# Altium PCB 除臭.PcbDoc
Units mm, origin at the board's own origin, x right, y up, seen from the top; angles counter-clockwise.
Board outline 21.83 x 37.08 mm, 2 copper layers (Top Layer, Bottom Layer); 39 components, 22 nets, 117 pads, 38 vias.
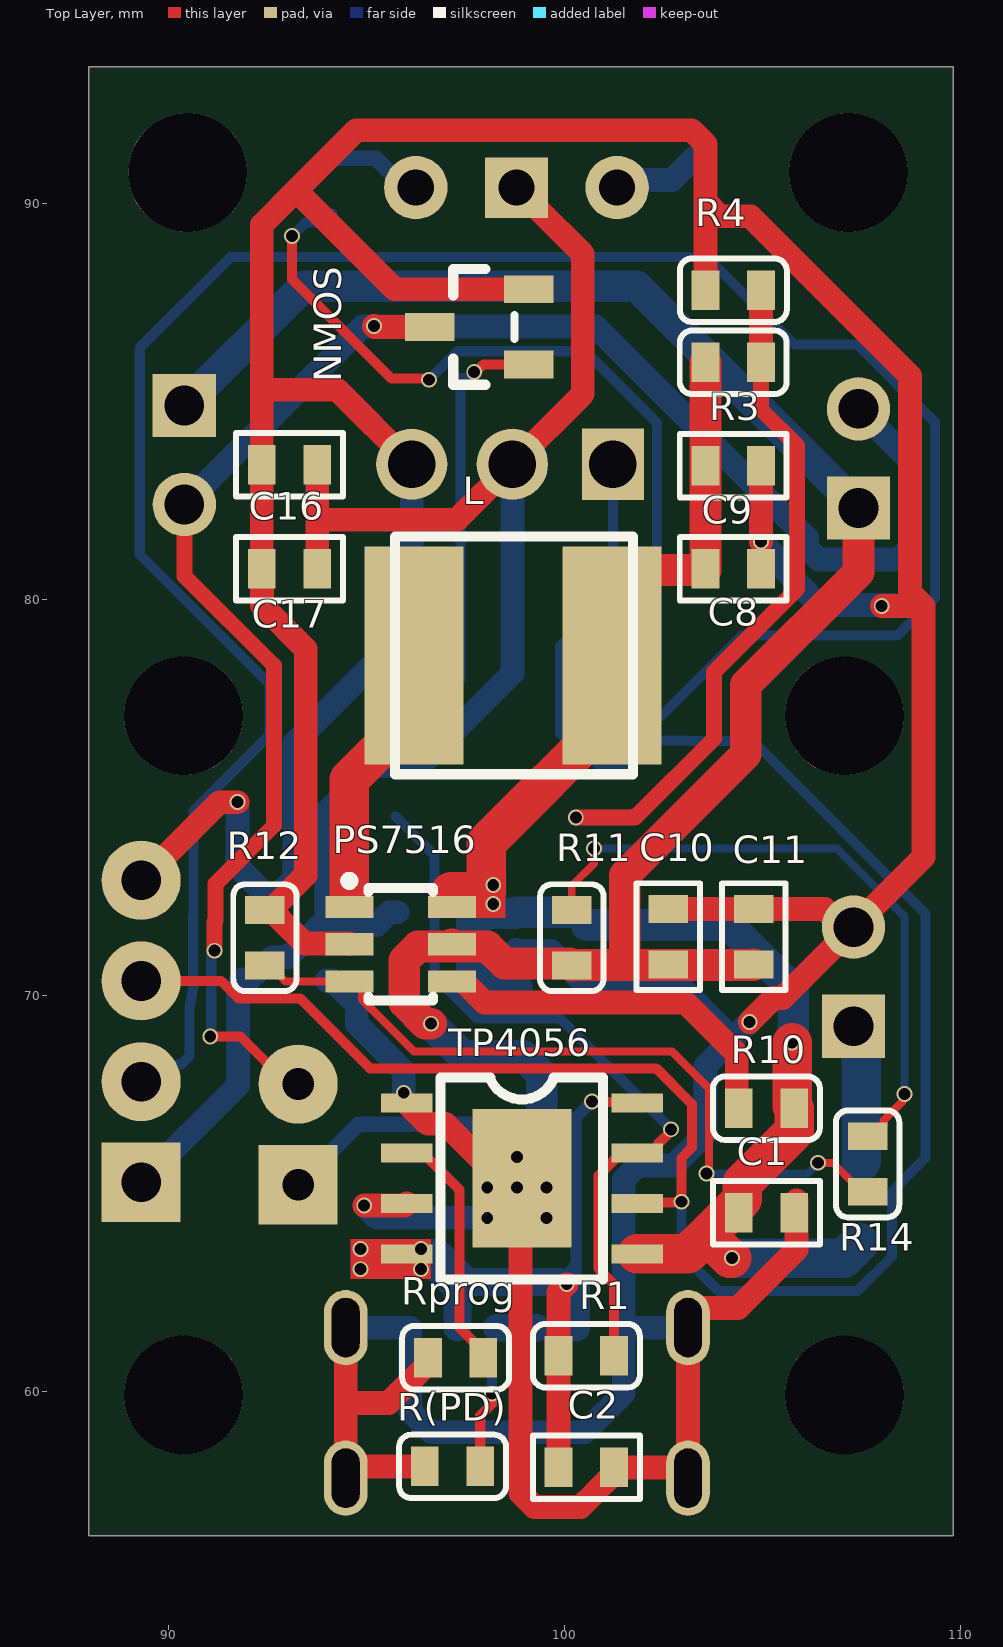
[diagram p0: Top Layer view]
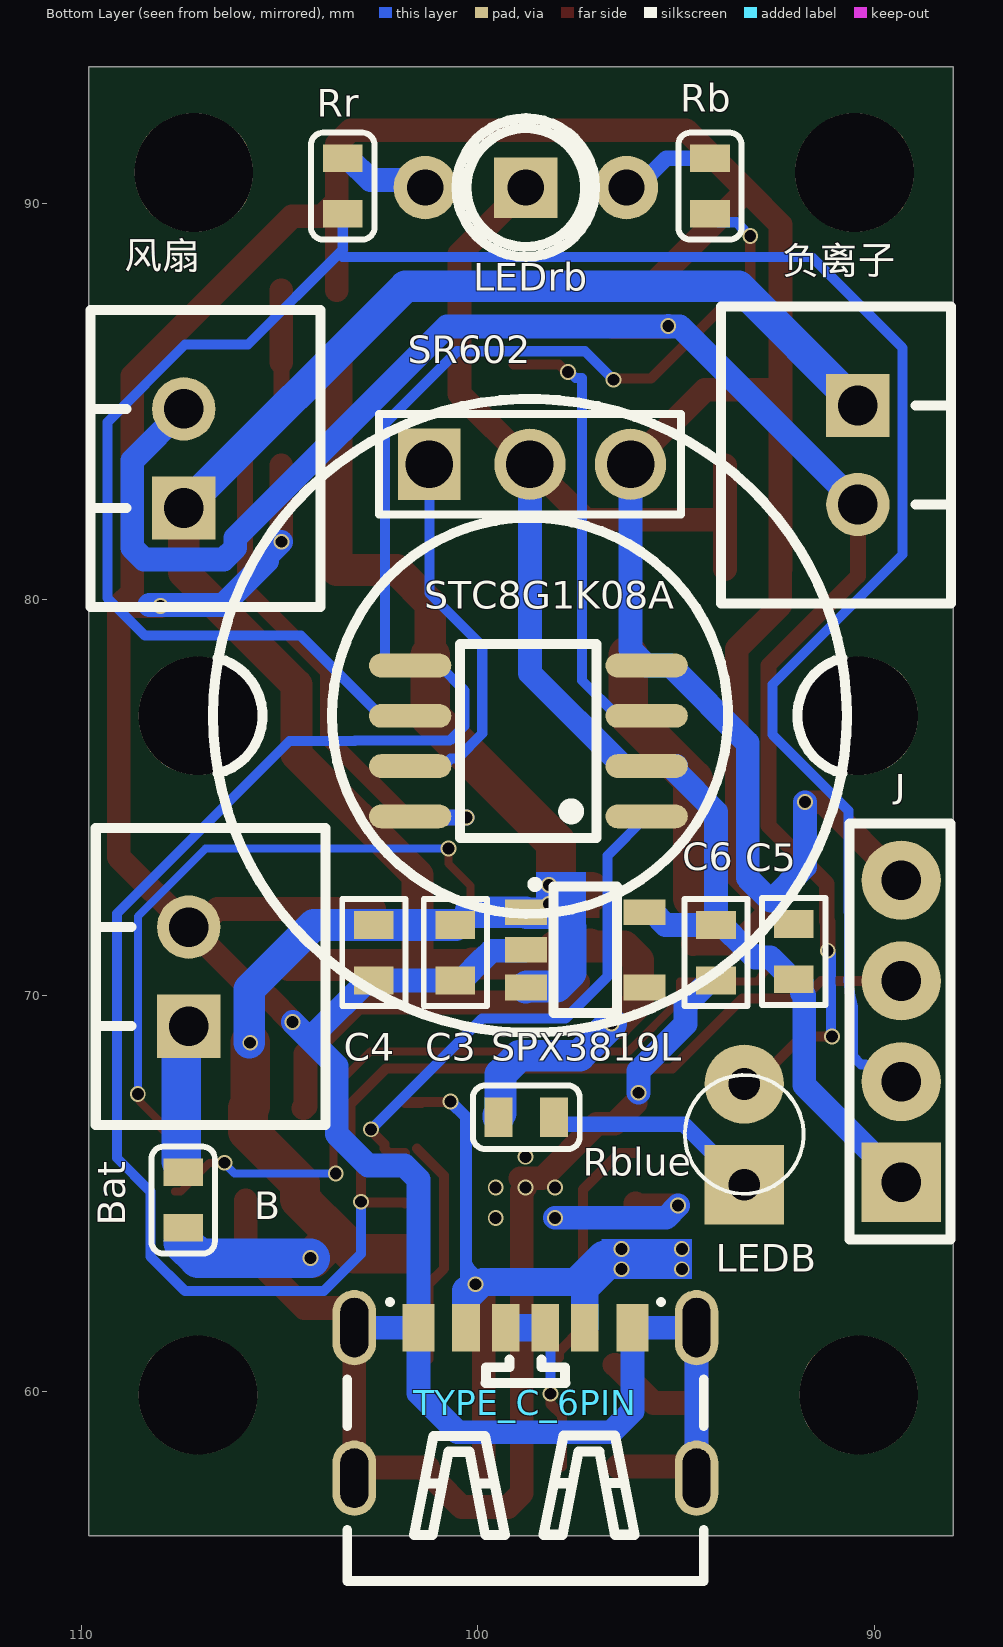
[diagram p1: Bottom Layer view, seen from below]
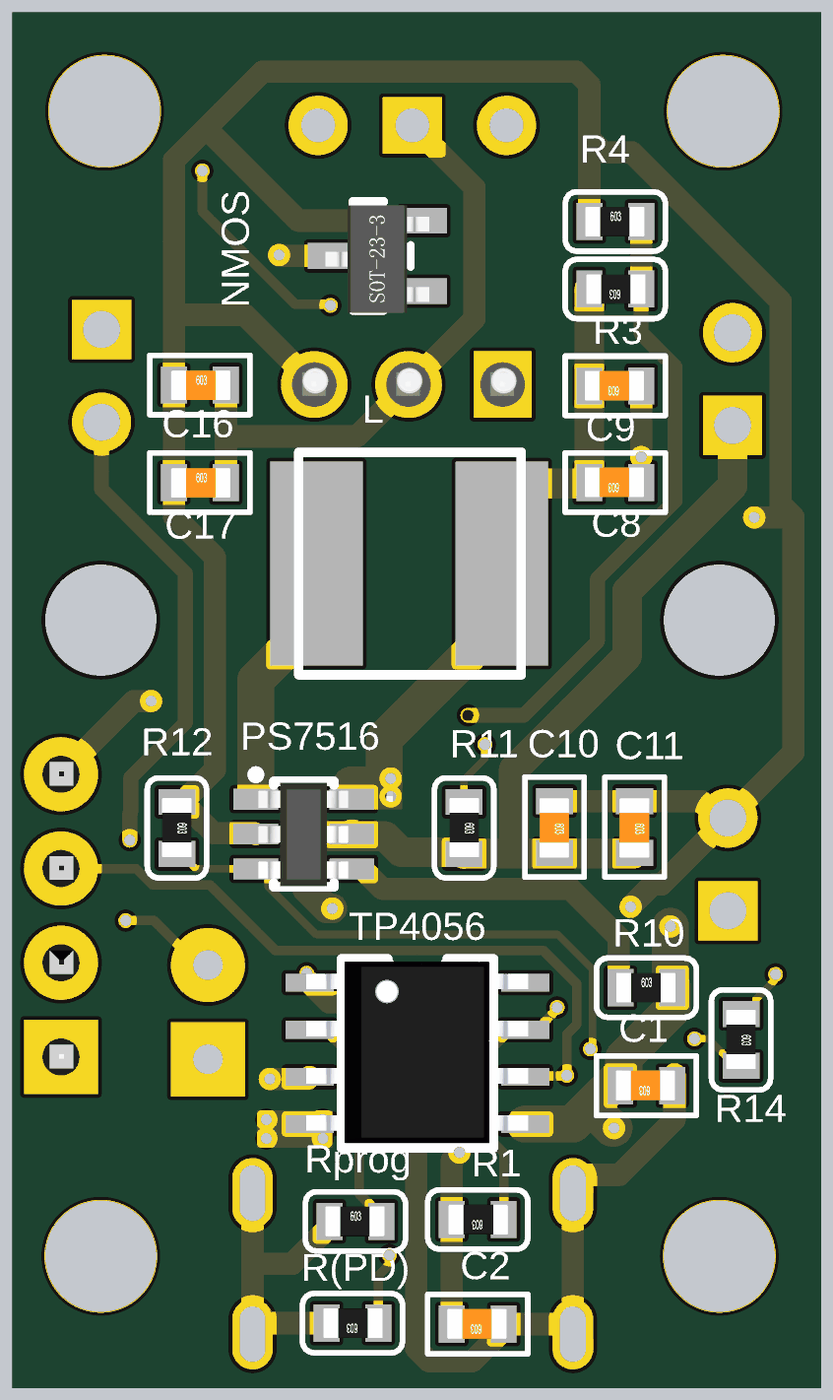
[diagram p2: 3D render of the assembled board from above, using the file's embedded part models]
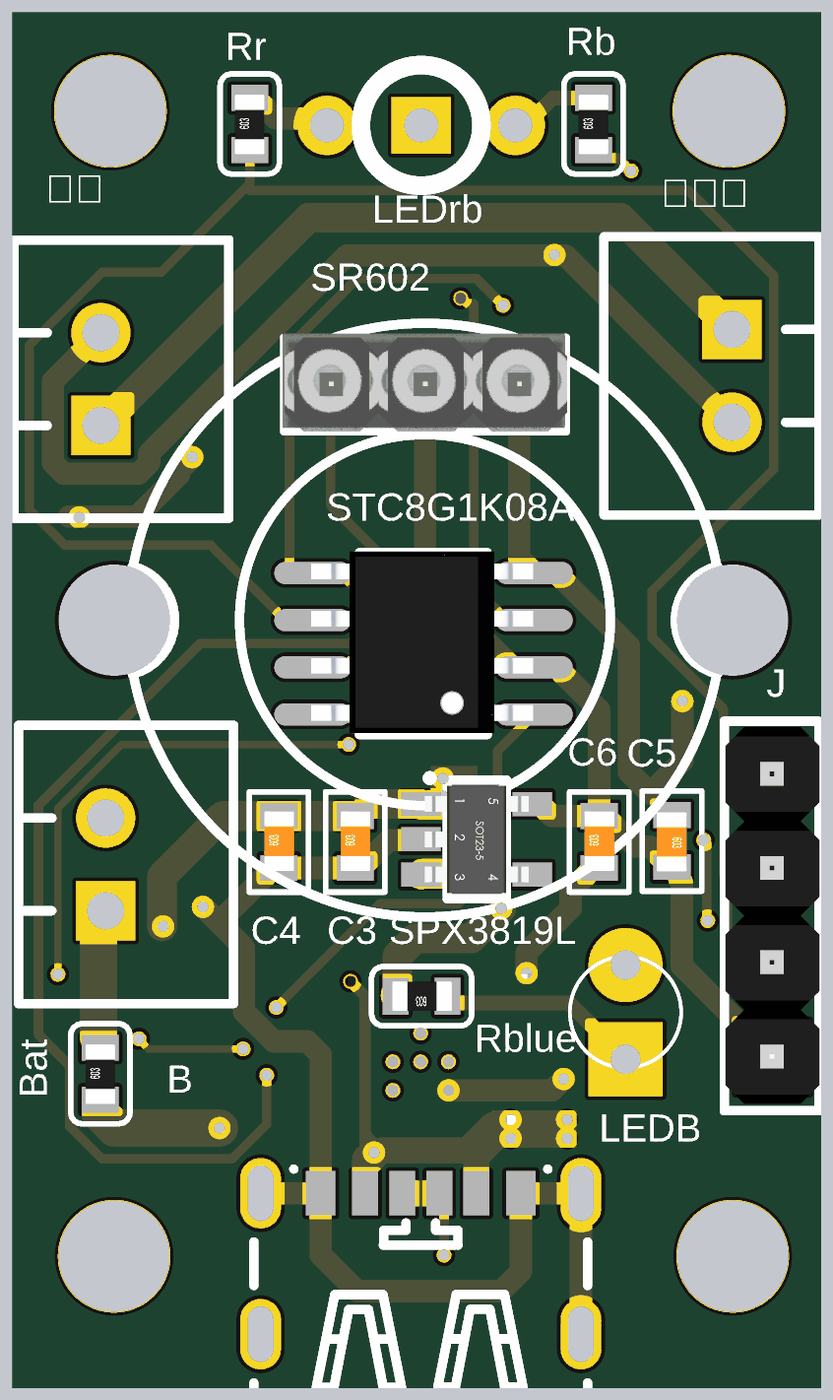
[diagram p3: 3D render of the assembled board from below, using the file's embedded part models]

## Layer stack, top to bottom
Top Solder: solder mask 0.0102, Solder Resist, Dk 3.5
Top Layer: signal copper 0.0356
Dielectric 1: dielectric 0.32, FR-4, Dk 4.8
Bottom Layer: signal copper 0.0356
Bottom Solder: solder mask 0.0102, Solder Resist, Dk 3.5

## Board outline
87.994,56.359 109.822,56.359 109.822,93.443 87.994,93.443

## Design rules (kind name [scope] priority, off if disabled: settings)
Clearance PUT [InPolygon] p1: gap=0.2 ignorepadtopadclearanceinfootprint=TRUE except(0: Arc-Hole Track-Hole SMDPad-Hole THPad-Hole Via-Hole Fill-Hole Poly-Hole Region-Hole Text-Hole)
Clearance [All] p2: gap=0.2 ignorepadtopadclearanceinfootprint=TRUE except(0: Arc-Hole Track-Hole SMDPad-Hole THPad-Hole Via-Hole Fill-Hole Poly-Hole Region-Hole Text-Hole)
ComponentClearance [All] p1 off: gap=0.254 collisioncheckmode=3 verticalgap=2540 showdistances=FALSE
PolygonConnect [All] p1: connectstyle=Direct reliefconductorwidth=0.254 reliefentries=4 polygonreliefangle="90 Angle" airgapwidth=0.254
RoutingVias [All] p1: holewidth=0.711 width=1.27 viastyle="Through Hole" minholewidth=0.711 minwidth=1.27 maxholewidth=0.711 maxwidth=1.27
SolderMaskExpansion [All] p1: expansion=0.102 istentingtop=FALSE
Width BAT [InNet('Bat')] p1: maxlimit=2 minlimit=0.6 preferedwidth=1
Width 5V [InNet('5V')] p2: maxlimit=3 minlimit=0.254 preferedwidth=0.6
Width VUSB [InNet('+VUSB')] p3: maxlimit=5 minlimit=0.254 preferedwidth=2
Width First_rules [All] p4: maxlimit=1 minlimit=0.2 preferedwidth=0.254
29 further rules are at their usual default settings.

## Components (designator, comment, footprint, x,y, rotation, side; value= is the part's Value field where it differs from the comment)
B "保险丝" "0603 电阻" 107.441,64.821 r90 bottom
Bat "Li-lon" XH-2.54-2P 107.302,70.688 r90 bottom locked
C1 "10uF" "0603 电容" 105.088,64.537 r180 top
C2 "10uF" "0603 电容" 100.542,58.111 r180 top
C3 "10uF" "0603 电容" 100.542,71.091 r90 bottom
C4 "100nF" "0603 电容" 102.599,71.091 r90 bottom
C5 "100nF" "0603 电容" 92.05,71.095 r270 bottom
C6 "10uF" "0603 电容" 93.963,71.091 r90 bottom
C8 "10uF" "0603 电容" 104.25,80.793 r180 top
C9 "100nF" "0603 电容" 104.25,83.401 r180 top
C10 "100nF" "0603 电容" 102.599,71.472 r270 top
C11 "22uF" "0603 电容" 104.758,71.472 r270 top
C16 "10uF" "0603 电容" 93.071,83.371 r0 top
C17 "100nF" "0603 电容" 93.071,80.743 r0 top
J "插针 1*4 排座" 插针1*4 89.264,69.186 r0 bottom locked
L "10uH" "电感 贴片 6*6" 101.727,81.584 r180 top
LEDB "LED3MM" LED3MM 93.226,66.52 r90 bottom locked
LEDrb "双色灯" 双色LED_F3 98.559,90.683 r180 bottom locked
NMOS "SSM35324R" NOMOS 97.748,86.788 r0 top
PS7516 "PS7516" PS7516 96.122,71.091 r270 top locked
R1 "1.2k" "0603 电阻" 100.567,60.905 r180 top
R3 "10k" "0603 电阻" 104.276,85.984 r180 top
R4 "10k" "0603 电阻" 104.25,87.804 r0 top
R10 "10K" "0603 电阻" 105.088,67.154 r0 top
R11 "510k" "0603 电阻" 100.186,71.472 r270 top
R12 "100k" "0603 电阻" 92.439,71.472 r270 top
R14 "15k" "0603 电阻" 107.654,65.76 r270 top
R(PD) "5.1k" "0603 电阻" 97.189,58.111 r180 top
Rb "1K" "0603 电阻" 94.141,90.42 r90 bottom
Rblue "1K" "0603 电阻" 98.764,66.925 r0 bottom
Rprog "1.2k" "0603 电阻" 97.24,60.854 r0 top
Rr "1K" "0603 电阻" 103.412,90.42 r90 bottom
SPX3819L "SPX3819L" SPX3819 97.288,71.33 r180 bottom locked
SR602 "SR602" SR602 98.789,77.06 r270 bottom locked
STC8G1K08A "STC8G1K08A" STC8G1K08A 98.766,76.21 r0 bottom locked
TP4056 "TP4056" TP4056 98.789,65.122 r270 top locked
TYPE_C_6PIN "TYPE_C_6PIN" TYPE_C_PIN 98.281,59.534 r180 bottom locked
负离子 "XH2.54-2p" XH-2.54-2P 90.403,83.431 r270 bottom locked
风扇 "XH2.54-2p" XH-2.54-2P 107.429,83.769 r90 bottom locked

## Footprints (in the part's own frame and the unit in brackets; to place one, negate y for a bottom-side part, rotate by r counter-clockwise, add the part's x,y. Pads: shape width x height; smd on the part's side, far side on the other; paste and mask are expansions set on the pad)
"0603 电容" [mm]
  rect 0.7x1 smd: 1(-0.711,0.025) 2(0.689,0.025)
  silkscreen extent -1.36,-0.77 1.34,0.83, body extent -0.79,-0.38 0.81,0.42, height 0.3
"0603 电阻" [mm]
  rect 0.7x1 smd: 1(-0.686,0) 2(0.714,0)
  silkscreen extent -1.34,-0.8 1.36,0.8, body extent -0.8,-0.4 0.8,0.4, height 0.3
LED3MM [mm]
  rect 2x2 hole 0.8: 1(-1.297,0.052)
  round 2 hole 0.8: 2(1.243,0.052)
  silkscreen extent -1.53,-1.44 1.47,1.55, body extent -1.59,-1.63 1.4,1.37, height 12.5
NOMOS [mm]
  rect 1.25x0.7 smd: 1(1.346,-0.862) 2(1.346,1.038) 3(-1.153,0.088)
  silkscreen extent -0.55,-1.37 1,1.55, body extent -1.3,-1.45 1.5,1.45, height 1.2
PS7516 [mil]
  rect 22.2x47.7 smd: 1(-45,-61.15) 2(-8,-61.15) 3(29,-61.15) 4(29,40.85) 5(-8,40.85) 6(-45,40.85)
  silkscreen extent -75,-65 48,22, body extent -62,-58 48,37, height 43
SPX3819 [mil]
  rect 41.8x25.6 smd: 1(-59.1,30.39) 2(-59.1,-7.01) 3(-59.1,-44.41) 4(59,-44.41) 5(59,30.39)
  silkscreen extent -53,-70 31,60, body extent -55,-64 55,50, height 43
SR602 [mm]
  rect 1.8x1.575 hole 1.2: 1(-6.35,-2.437)
  round 1.8 hole 1.2: 2(-6.35,0.103) 3(-6.35,2.643)
  round 3 hole 3 unplated: ""(0,-8.279) ""(0,8.402)
  silkscreen extent -8,-7.9 8,8.1, body extent -8.03,-10.94 7.97,10.94, height 18.5
STC8G1K08A [mm]
  oval 2.078x0.6 smd: 1(-3.025,1.69) 2(-3.025,0.42) 3(-3.025,-0.85) 4(-3.025,-2.12) 5(2.944,-2.12) 6(2.944,-0.85) 7(2.944,0.42) 8(2.944,1.69)
  silkscreen extent -1.76,-2.67 1.69,2.23, body extent -2.99,-2.7 3,2.2, height 1.55
TP4056 [mm]
  rect 0.48x1.3 smd: 1(-2.167,-2.77) 2(-0.897,-2.77) 3(0.373,-2.77) 4(1.643,-2.77) 5(1.643,3.046) 6(0.373,3.046) 7(-0.897,3.046) 8(-2.167,3.046)
  rect 3.5x2.5 smd: 9(-0.262,0.138)
  silkscreen extent -2.81,-1.91 2.29,2.19, body extent -2.74,-2.87 2.16,3.12, height 1.55
TYPE_C_PIN [mm]
  oval 1.1x1.899 hole 0.7 slot 1.5 at 90 deg: 7(-4.838,-1.72) 7(-4.838,2.08) 7(3.802,-1.72) 7(3.802,2.08)
  rect 0.7x1.2 smd: A5(-1.018,2.08) A9(0.982,2.08) B5(-0.018,2.08) B9(-2.018,2.08)
  rect 0.8x1.2 smd: A12(2.182,2.08) B12(-3.218,2.08)
  silkscreen extent -5.02,-4.32 3.98,2.73, body extent -5.21,-4.45 4.45,3.05, height 3
XH-2.54-2P [mm]
  rect 1.6x1.6 hole 1: 1(-1.463,-0.004)
  round 1.6 hole 1: 2(1.037,-0.004)
  silkscreen extent -3.96,-3.45 3.54,2.35, body extent -4.06,-3.56 3.71,2.46, height 7.2
双色LED_F3 [mm]
  round 1.6 hole 0.914: 1(-2.77,-0.289) 2(2.31,-0.289)
  rect 1.6x1.524 hole 0.914: 3(-0.23,-0.289)
  silkscreen extent -1.98,-2.04 1.52,1.46, body extent -1.74,-1.8 1.24,1.19, height 12.5
插针1*4 [mm]
  rect 2x2 hole 1: 1(0.05,3.9)
  round 2 hole 1: 2(0.05,1.36) 3(0.05,-1.18) 4(0.05,-3.72)
  silkscreen extent -1.2,-5.15 1.35,5.35, body extent -1.22,-4.99 1.32,5.17, height 8.38
"电感 贴片 6*6" [mm]
  rect 2.5x5.5 smd: 1(0.525,3.001) 2(5.525,3.001)
  silkscreen extent 0,0 6,6, body extent 0.12,0.4 5.83,5.6, height 4.5

## Part data
B R1 R3 R4 R10 R11 R12 R14 R(PD) Rb Rblue Rprog Rr: library part 电阻
Bat: library part XH2.54-2p
C1 C2 C3 C4 C5 C6 C8 C9 C10 C11 C16 C17: library part "电容 无极"
L: library part 电感
NMOS: library part NMOS
SPX3819L: library part SPX3819LM

## Free pads (board coordinates)
  round 3 hole 3: 104(90.387,59.915) 104(90.49,90.776) 104(107.068,59.915) 104(107.171,90.776)

## Via types
v1: diameter 0.4, hole 0.3, Top Layer to Bottom Layer, 38 vias

## Nets (pads, with @x,y where several pads share a name; then routed paths per layer and width w, separated by ;. In a path a pad name is that pad's centre, name@x,y a point inside that pad or via, vN(x,y) a via of type N, cw(c..) or ccw(c..) an arc to the next point about the centre after c; other vN are vias at no path point)
3V3: C5.2 C6.2 C16.2 C17.2 J.1 LEDrb.3 SPX3819L.5 SR602.2 STC8G1K08A.2 | length 41.5
  Top Layer w0.6: C17.2@93.763,80.768 93.763,82.01 ; C16.2@93.763,83.384 93.763,82.01 ; LEDrb.3 98.827,90.395 99.289,89.933 99.289,89.895 100.466,88.718 100.466,85.189 SR602.2 97.286,82.01 93.763,82.01
  Bottom Layer w0.6: J.1 91.759,67.73 91.759,70.004 91.824,70.07 91.824,70.356 91.87,70.402 C5.2@92.056,70.402 ; C5.2@92.224,70.563 92.617,70.956 93.008,70.956 93.281,71.229 93.289,71.229 93.789,71.729 93.939,71.729 C6.2 ; SPX3819L.5 95.584,72.102 95.262,71.779 C6.2 ; SR602.2 98.686,78.134 96.342,75.79 STC8G1K08A.2 95.002,75.79 95.002,75.651 93.989,74.637 C6.2
5V: C10.2 C11.2 PS7516.5 R11.2 Rblue.2 负离子.1 风扇.1 | length 50.2
  Top Layer w0.8: v1(96.63,69.287) 96.49,69.287 95.954,69.824 95.954,70.884 96.305,71.236 97.102,71.236 PS7516.5 ; PS7516.5@97.16,71.236 98.058,71.236 98.486,70.807 100.136,70.807 R11.2 100.199,70.77 101.558,70.77 ; C11.2 104.771,70.77 102.625,70.77 101.558,70.77 ; 风扇.1 107.425,80.685 104.58,77.84 104.58,76.091 101.525,73.035 101.525,70.803 101.558,70.77
  Bottom Layer w0.8: 负离子.1 93.419,87.905 101.826,87.905 风扇.1 ; v1(96.63,69.287) 97.437,68.48 98.959,68.48 99.428,68.012 99.428,67.025 99.478,66.975 Rblue.2
+VUSB: C2.2 R1.2 TP4056.4 TP4056.8 TYPE_C_6PIN.A9 TYPE_C_6PIN.B9 | length 18
  Top Layer w0.254: v1(100.694,67.323) 100.712,67.305 101.818,67.305 TP4056.8 TP4056.8@101.426,67.288
  Top Layer w0.6: C2.2 R1.2 99.853,62.502 v1(100.059,62.709)
  Top Layer w1: 95.098,63.352 95.106,63.344
  Bottom Layer w0.254: 99.297,62.836 ccw(c99.551,63.598) 100.299,63.305 ccw(c99.551,63.598) 100.313,63.344
  Bottom Layer w0.3: 100.27,62.582 100.299,62.582 100.299,63.305 100.299,63.344 100.299,66.928 v1(100.694,67.323)
  Bottom Layer w0.7: TYPE_C_6PIN.A9 97.299,62.802 ; 97.721,62.764 99.297,62.764 99.877,62.764 100.179,62.462 ; 100.27,62.582 100.299,62.552 TYPE_C_6PIN.B9
  Bottom Layer w1: 96.789,63.312 97.299,62.802
  other v1: 94.852,63.09 96.376,63.09 94.852,63.598 96.376,63.598
ADC: R3.1 R4.2 STC8G1K08A.8 | length 18.3
  Top Layer w0.4: v1(100.288,74.494) 101.786,74.494 103.78,76.488 103.78,78.171 105.876,80.267 105.876,83.877 104.961,84.791 R3.1
  Top Layer w0.6: R3.1 104.963,85.985 104.963,87.802 R4.2
  Bottom Layer w0.4: v1(100.288,74.494) 101.685,74.494 STC8G1K08A.8
Bat: B.1 C1.2 C3.2 C4.2 C8.2 C9.2 L.1 PS7516.6 R3.2 R10.2 SPX3819L.1 SPX3819L.3 TP4056.5 | length 41.8
  Top Layer w0.8: L.1 101.202,79.893 102.052,80.743 103.561,80.743 C8.2 C9.2 R3.2
  Top Layer w1: 97.138,72.615 98.027,72.615 98.027,73.853 101.202,77.028 L.1 ; TP4056.5 103.115,63.478 103.589,63.953 ; v1(104.228,63.369) 104.173,63.369 103.589,63.953 ; v1(105.749,68.805) 105.749,67.207 R10.2 105.803,66.572 104.49,65.26 104.49,64.853 104.349,64.713 103.589,63.953
  Bottom Layer w0.8: SPX3819L.3 98.764,70.226 98.01,70.226 97.658,70.578 97.658,71.725 98.01,72.077 98.764,72.077 SPX3819L.1 C3.2@100.195,72.102 ; C3.2 C4.2 104.146,71.779 105.774,70.151 v1@105.774,68.805
  Bottom Layer w1: v1(104.228,63.369) 107.056,63.369 107.441,63.754
  other v1: 104.228,63.369 98.205,72.31 98.205,72.792
CHRG: R1.1 STC8G1K08A.1 TP4056.7 | length 19
  Top Layer w0.254: R1.1@101.253,60.827 101.253,62.708 100.859,63.103 100.859,65.451 TP4056.7@101.539,66.131 ; TP4056.7 102.246,66.018 102.359,66.131 102.359,66.244 102.695,66.581 v1(102.695,66.62)
  Bottom Layer w0.254: STC8G1K08A.1 96.725,73.536 96.725,70.483 97.794,69.414 99.901,69.414 v1(102.695,66.62)
GND: Bat.2 C1.1 C2.1 C3.1 C4.1 C5.1 C6.1 C8.1 C9.1 C10.1 C11.1 C16.1 C17.1 J.4 NMOS.2 PS7516.2 R4.1 R12.1 R(PD).2 Rprog.1 SPX3819L.2 SR602.3 STC8G1K08A.4 TP4056.1 TP4056.3 TP4056.9 TYPE_C_6PIN.7 TYPE_C_6PIN.A12 TYPE_C_6PIN.B12 | length 178.6
  Top Layer w0.6: J.4@89.693,72.906 J.4 91.288,74.879 v1(91.745,74.879) ; TYPE_C_6PIN.7@94.289,61.804 94.479,61.614 94.479,59.714 ; PS7516.2 94.551,71.312 93.442,71.312 93.146,71.607 93.139,71.607 92.589,72.157 93.468,73.036 93.468,78.749 92.366,79.851 92.366,80.762 C17.1 C16.1 92.36,85.289 ; v1(94.945,64.694) 95.965,64.694 TP4056.3 ; TP4056.1 96.549,66.758 97.001,66.758 98.376,65.383 TP4056.9 ; SR602.3 94.267,85.289 92.36,85.289 ; 96.475,58.111 94.71,58.111 94.479,57.88 94.479,57.814 94.479,59.714 ; Rprog.1@96.554,60.677 96.552,60.675 96.525,60.675 95.563,59.714 94.479,59.714 ; v1(98.802,65.155) 98.891,65.067 98.891,57.437 99.242,57.086 100.41,57.086 100.779,57.454 100.779,57.462 101.253,57.936 C2.1 102.888,58.086 103.119,57.855 TYPE_C_6PIN.7@103.119,57.814 ; NMOS.2 95.719,87.826 93.224,90.32 ; C10.1 C11.1 106.57,72.183 107.028,71.726 Bat.2 ; TYPE_C_6PIN.7@103.119,58.309 103.119,61.614 103.119,61.878 103.35,62.109 104.382,62.109 105.859,63.585 C1.1@105.859,64.822 ; R4.1 103.561,87.807 103.561,90.041 ; v1(104.676,69.332) 105.277,69.933 105.505,69.933 Bat.2 ; v1(104.961,81.454) C9.1 ; v1(108.009,79.828) 109.068,79.828 ; 92.36,85.289 92.36,89.456 93.224,90.32 ; 93.224,90.32 94.746,91.842 103.21,91.842 103.561,91.491 103.561,90.041 ; 103.561,90.041 103.933,89.67 104.696,89.67 108.725,85.64 108.725,80.171 109.068,79.828 ; Bat.2 109.068,73.496 109.068,79.828
  Bottom Layer w0.6: v1(91.745,74.879) 91.745,73.25 92.606,72.388 93.189,72.97 93.189,76.377 95.141,78.33 STC8G1K08A.4 96.146,78.735 SR602.3 ; C6.1 94.139,70.379 94.759,69.759 94.759,69.279 95.944,68.093 v1(95.944,67.543) ; TYPE_C_6PIN.7@94.479,57.814 94.479,61.614 TYPE_C_6PIN.A12 96.099,59.506 96.63,58.975 100.516,58.975 101.499,59.958 TYPE_C_6PIN.B12 ; v1(94.945,64.694) 95.254,64.385 v1(98.053,64.385) ; SPX3819L.2 98.814,71.126 99.663,71.126 99.86,70.929 99.867,70.929 100.417,70.379 C3.1 C4.1 102.775,70.379 104.095,69.059 ; TYPE_C_6PIN.7@103.119,61.614 TYPE_C_6PIN.B12 ; v1(104.676,69.332) 104.249,68.905 103.564,68.22 103.564,66.5 102.771,65.706 101.851,65.706 101.499,65.354 TYPE_C_6PIN.B12 ; v1(104.961,81.454) 105.325,81.09 105.325,80.968 106.44,79.854 108.289,79.854
  other v1: 99.551,64.385 98.053,65.155 99.551,65.155 98.802,65.926
NetB_2: B.2 Bat.1 | length 3.5
  Bottom Layer w1: Bat.1 107.493,69.031 B.2@107.493,65.811
NetL_2: L.2 PS7516.1 | length 6.8
  Top Layer w1: PS7516.1@94.569,72.452 94.569,75.45 96.202,77.084 L.2
NetLEDB_1: LEDB.1 Rblue.1 | length 5.5
  Bottom Layer w0.4: LEDB.1 94.801,66.747 97.928,66.747 98.078,66.897 Rblue.1
NetLEDB_2: LEDB.2 NMOS.3 负离子.2 风扇.2 | length 46.1
  Top Layer w0.254: v1(91.059,68.961) 91.821,68.961 93.019,67.763 LEDB.2
  Top Layer w0.4: 负离子.2 90.407,80.59 92.668,78.33 92.668,74.291 91.195,72.818 91.195,71.878 91.168,71.852 v1(91.168,71.13)
  Top Layer w0.6: v1(95.194,86.901) 95.219,86.876 NMOS.3
  Bottom Layer w0.254: v1(91.059,68.961) 91.084,68.986 91.084,70.17 ccw(c89.314,70.366) 91.084,70.561 91.084,71.046 v1(91.168,71.13)
  Bottom Layer w0.6: 负离子.2 94.903,86.889 v1@95.182,86.889 ; v1(95.194,86.901) v1@95.182,86.889 ; 风扇.2 108.725,83.507 108.725,81.299 108.432,81.007 106.418,81.007 106.125,81.299 106.125,81.547 100.783,86.889 v1@95.182,86.889
NetLEDrb_1: LEDrb.1 Rr.2 | length 2.5
  Bottom Layer w0.6: LEDrb.1 101.52,90.586 102.714,90.586 103.262,91.134 Rr.2 Rr.2@103.362,91.084
NetLEDrb_2: LEDrb.2 Rb.2 | length 2.5
  Bottom Layer w0.4: Rb.2 95.241,91.134 95.981,90.395 LEDrb.2 LEDrb.2@96.2,90.345
NetNMOS_1: NMOS.1 STC8G1K08A.3 | length 11.5
  Top Layer w0.254: v1(97.722,85.735) 97.762,85.735 97.953,85.926 NMOS.1
  Bottom Layer w0.254: STC8G1K08A.3 96.48,77.06 97.373,77.953 97.373,85.587 97.534,85.587 97.683,85.735 v1(97.722,85.735)
NetPS7516_3: PS7516.3 R12.2 R14.2 | length 19.5
  Top Layer w0.2: R12.2 92.589,70.757 92.839,70.507 92.839,70.471 92.956,70.354 94.893,70.354 94.893,69.895 96.2,68.587 102.715,68.587 103.649,67.653 103.649,65.562 v1(103.59,65.503) ; v1(106.398,65.777) 106.417,65.777 106.42,65.773 106.776,65.773 107.504,65.045 R14.2
  Bottom Layer w0.2: v1(103.59,65.503) 106.143,65.503 106.398,65.758 v1(106.398,65.777)
NetPS7516_4: PS7516.4 R10.1 | length 9
  Top Layer w0.6: PS7516.4@97.466,70.336 97.981,69.821 103.056,69.821 104.353,68.524 104.353,67.204 R10.1
NetR11_1: R11.1 R14.1 | length 16.4
  Top Layer w0.2: R11.1 100.186,72.767 100.745,73.326 v1(100.745,73.707) ; R14.1 107.804,66.445 108.054,66.695 108.054,66.845 108.547,67.338 108.547,67.475 v1(108.585,67.513)
  Bottom Layer w0.2: v1(100.745,73.707) 106.873,73.707 108.585,71.994 v1(108.585,67.513)
NetR(PD)_1: R(PD).1 TYPE_C_6PIN.A5 TYPE_C_6PIN.B5 | length 4.7
  Top Layer w0.254: 97.875,58.111 97.875,59.394 98.171,59.69 v1(98.171,59.944)
  Bottom Layer w0.254: v1(98.171,59.944) 98.171,61.452 98.154,61.469 TYPE_C_6PIN.B5
  Bottom Layer w0.7: TYPE_C_6PIN.B5 TYPE_C_6PIN.A5
NetRprog_2: Rprog.2 TP4056.2 | length 6.2
  Top Layer w0.254: TP4056.2 96.429,66.018 97.35,65.097 97.35,61.608 97.954,61.004 Rprog.2
P32: SR602.1 STC8G1K08A.7 | length 9.5
  Bottom Layer w0.254: SR602.1 101.226,80.159 99.89,78.823 99.89,76.612 100.523,75.979 100.689,75.979 100.877,75.79 STC8G1K08A.7
RXD: J.3 Rb.1 STC8G1K08A.5 TP4056.6 | length 69.1
  Top Layer w0.254: J.3 91.336,70.366 91.774,69.927 93.323,69.927 95.09,68.16 102.316,68.16 103.222,67.254 103.222,66.166 102.955,65.899 v1(102.955,64.791) 102.933,64.77 101.857,64.77 TP4056.6 ; v1(93.125,89.169) 93.125,88.083 95.637,85.571 96.551,85.571 v1(96.579,85.543)
  Bottom Layer w0.254: 93.3,89.344 93.467,89.511 ; Rb.1 Rb.1@93.926,89.519 ; v1(96.579,85.543) 97.299,86.262 100.523,86.262 102.341,84.445 102.341,78.489 102.181,78.33 STC8G1K08A.5 100.971,78.33 100.344,77.703 100.344,76.8 100.711,76.433 103.099,76.433 103.107,76.425 104.759,76.425 109.112,72.071 109.112,65.893 108.268,65.05 108.268,63.411 107.399,62.542 103.886,62.542 102.955,63.473 v1(102.955,64.791) ; 93.467,89.511 93.918,89.511 Rb.1@93.926,89.519 ; 93.467,89.511 93.475,89.519 Rb.1@93.926,89.519
TXD: J.2 Rr.1 STC8G1K08A.6 | length 58.6
  Bottom Layer w0.254: J.2 89.787,67.826 90.219,68.258 90.327,68.258 90.532,68.463 90.532,69.602 90.532,69.707 90.613,70.092 ccw(c89.314,70.366) 90.63,70.534 90.63,71.234 90.641,72.896 ccw(c89.314,72.906) 90.641,72.906 90.641,73.153 90.641,74.662 92.562,76.583 92.562,77.852 89.28,81.133 89.28,86.349 91.574,88.642 103.412,88.642 ; STC8G1K08A.6 102.449,77.06 104.472,79.083 108.405,79.083 109.352,80.03 109.352,84.473 107.392,86.434 105.804,86.434 103.412,88.825 Rr.1
pads on no net: SPX3819L.4 SR602.

## Polygon pours and split planes (outlines as drawn)
no net on Bottom Layer "NONET_L02_P000" (solid, pour order 0): 99.678,63.09

## Other copper
Top Layer:
  rectangle net +VUSB: 94.598,62.836 96.63,63.852
  rectangle net Bat: 96.935,71.954 98.51,73.021
  pour cut-out: 106.79,83.307 106.813,80.938 106.401,80.526 106.332,80.526 106.257,80.601 106.257,83.307
Bottom Layer:
  rectangle net +VUSB: 94.598,62.836 96.884,63.852
  rectangle net Bat: 97.265,71.725 98.535,73.123
  pour cut-out: 101.56,82.31 102.007,82.31 102.007,78.839 100.815,78.839 100.5,78.525 100.5,78.33 100.389,78.219 100.224,78.219 100.224,78.685 101.462,79.923 101.462,79.959 101.534,80.032 101.534,80.134 101.56,80.159
  pour cut-out: 94.498,74.145 94.498,72.329 94.539,72.289 95.05,72.289 95.059,72.297 95.059,72.627 96.391,72.627 96.391,73.398 95.741,74.049 94.76,74.049 94.625,74.183
  pour cut-out: 97.707,82.671 97.707,78.055 97.781,78.055 97.834,78.003 98.176,78.345 98.176,82.43 97.893,82.714 97.75,82.714
  pour cut-out: 101.227,87.167 106.308,82.085 106.377,82.085 106.425,82.134 106.425,82.441 101.573,87.294 101.279,87.294
  pour cut-out: 94.407,87.294 93.672,87.294 91.407,85.028 91.407,84.105 91.525,84.222 91.525,84.232 94.459,87.167 94.407,87.219
  pour cut-out: 92.791,88.309 91.712,88.309 89.614,86.21 89.614,85.894 90.542,85.894 92.84,88.191 92.791,88.24

## Silkscreen, mask and mechanical layers (free items; w line width, h text height)
Mechanical 1:
  the board outline again, w0.1